# Altium PCB 数粒机接收板12通道.PcbDoc (part 2 of 2)
Units mil, origin at the board's own origin, x right, y up, seen from the top; angles counter-clockwise.
Board outline 12834.65 x 2362.2 mil, 2 copper layers (Top Layer, Bottom Layer); 305 components, 115 nets, 805 pads, 274 vias.
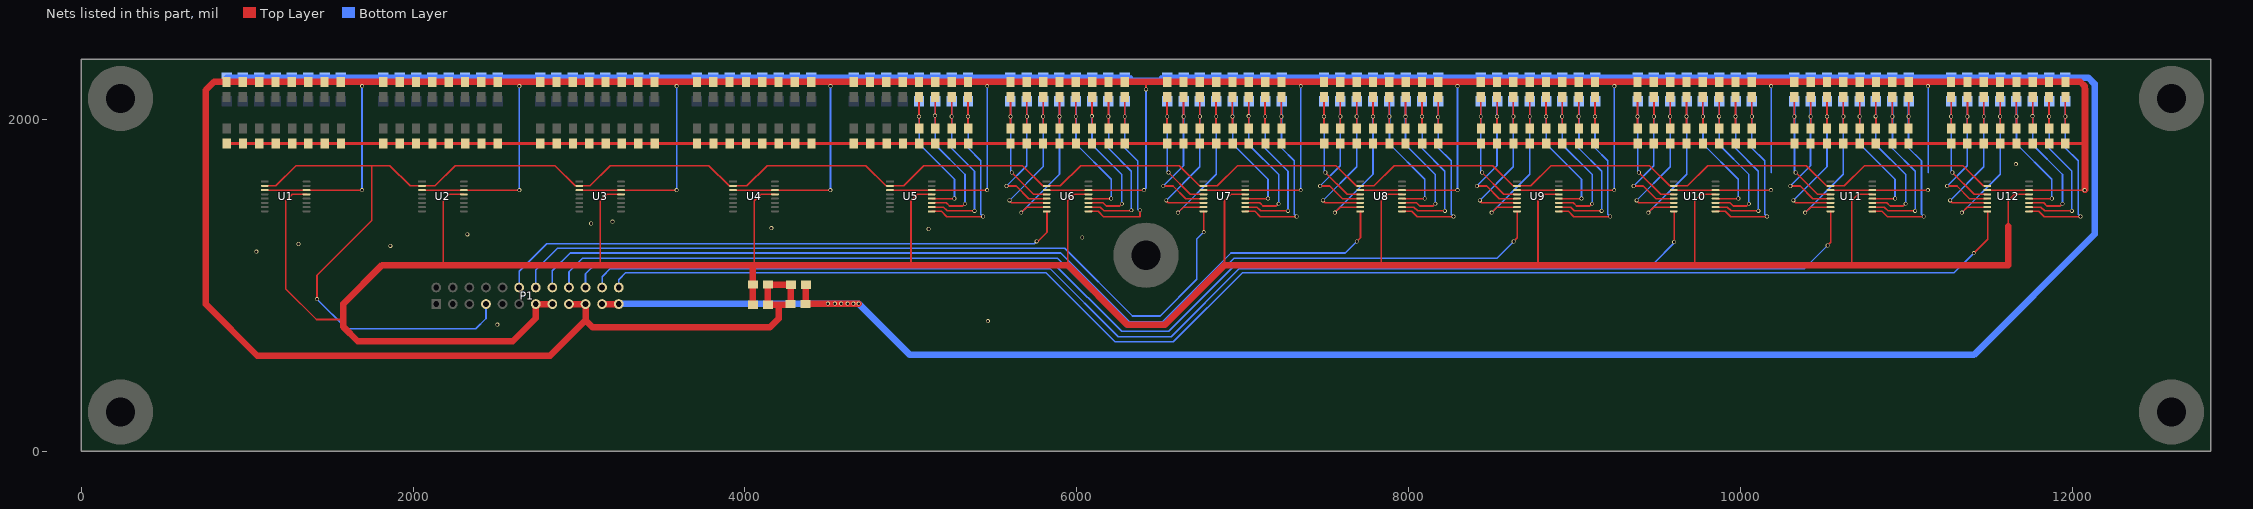
[diagram p2: the nets of this part, all layers, seen from the top]

## Via types
v1: diameter 23.62, hole 15.75, Top Layer to Bottom Layer, 274 vias

## Nets (pads, with @x,y where several pads share a name; then routed paths per layer and width w, separated by ;. In a path a pad name is that pad's centre, name@x,y a point inside that pad or via, vN(x,y) a via of type N, cw(c..) or ccw(c..) an arc to the next point about the centre after c; other vN are vias at no path point) (continued)
CH5-5: C41.2 D37.1 R37.2 U5.12 | length 999.9
  Top Layer w10: v1@5048.92,2017 R37.2@5048.92,2136.09 ; C41.2@5049.75,1945.78 v1@5049.75,2016.17 ; U5.12@5127.71,1522.36 5261.78,1522.36 v1(5262.74,1523.32)
  Bottom Layer w10: D37.1@5050.19,2110.24 5050.19,1851.88 5262.74,1639.32 v1(5262.74,1523.32)
  other v1: 5049.23,2017
CH5-6: C42.2 D38.1 R38.2 U5.11 | length 1096.2
  Top Layer w10: U5.11@5127.71,1496.77 5213.3,1496.77 5232.74,1477.32 5312.74,1477.32 v1(5326.74,1491.32) ; v1@5147.34,2017 R38.2@5147.34,2136.09 ; C42.2@5147.65,1945.78 v1@5147.65,2016.69
  Bottom Layer w10: D38.1@5147.12,2110.24 5147.12,1846.95 5326.74,1667.32 v1(5326.74,1491.32)
  other v1: 5145.34,2022
CH5-7: C43.2 D39.1 R39.2 U5.10 | length 1174
  Top Layer w10: U5.10@5127.71,1471.18 5196.89,1471.18 5219.74,1448.32 v1(5383.74,1448.32) ; C43.2@5246.08,1945.78 v1(5246.08,2017) R39.2@5246.08,2135.78
  Bottom Layer w10: D39.1@5247.19,2110.24 5247.19,1823.88 5383.74,1687.32 v1(5383.74,1448.32)
CH5-8: C44.2 D40.1 R40.2 U5.9 | length 1245.3
  Top Layer w10: U5.9@5127.71,1445.59 5184.48,1445.59 5216.74,1413.32 5434.74,1413.32 v1(5435.74,1414.32) ; C44.2@5344.5,1945.78 v1(5344.5,2017) R40.2@5344.5,2135.77
  Bottom Layer w10: D40.1@5345.12,2110.24 5345.12,1826.95 5421.74,1750.32 5421.74,1428.32 v1(5435.74,1414.32)
CH6: P1.12 U6.8 | length 3503.9
  Top Layer w10: v1(5758.3,1264.61) 5766.3,1264.61 5820.63,1318.93 5820.63,1443.59 U6.8@5818.63,1445.59
  Bottom Layer w10: P1.12@2639.3,986.61 2639.3,1084.61 2805.17,1250.48 5744.17,1250.48 v1(5758.3,1264.61)
CH6-1: C45.2 D41.1 R41.2 U6.4 | length 888.6
  Top Layer w10: C45.2@5600.41,1945.78 v1(5600.41,2017) R41.2@5600.41,2135.77 ; v1(5608.25,1679.42) 5739.72,1547.95 U6.4@5818.63,1547.95
  Bottom Layer w10: D41.1@5601.19,2110.24 5601.19,1686.48 v1(5608.25,1679.42)
CH6-2: C46.2 D42.1 R42.2 U6.5 | length 1025.7
  Top Layer w10: v1(5576.63,1598.32) 5635.63,1598.32 5711.59,1522.36 U6.5@5818.63,1522.36 ; C46.2@5698.83,1945.78 v1@5698.83,2016.98 ; v1@5699.61,2016.2 R42.2@5699.61,2135
  Bottom Layer w10: v1(5576.63,1598.32) 5698.07,1719.76 D42.1@5698.07,2110.24
  other v1: 5698.83,2017
CH6-3: C47.2 D43.1 R43.2 U6.6 | length 1104
  Top Layer w10: v1(5594.63,1511.32) 5594.63,1509.32 5607.18,1496.77 U6.6@5818.63,1496.77 ; C47.2@5797.26,1945.78 v1(5797.26,2017) R43.2@5797.26,2135.77
  Bottom Layer w10: v1(5594.63,1511.32) 5797.07,1713.76 D43.1@5797.07,2110.24
CH6-4: C48.2 D44.1 R44.2 U6.7 | length 1124.1
  Top Layer w10: v1(5665.63,1438.23) 5698.57,1471.18 U6.7@5818.63,1471.18 ; C48.2@5895.69,1945.78 v1(5895.69,2017) R44.2@5895.69,2135.77
  Bottom Layer w10: v1(5665.63,1438.23) 5896.07,1668.68 D44.1@5896.07,2110.24
CH6-5: C49.2 D45.1 R45.2 U6.12 | length 999.9
  Top Layer w10: v1@5993.8,2017 R45.2@5993.8,2136.09 ; C49.2@5994.63,1945.78 v1@5994.63,2016.17 ; U6.12@6072.59,1522.36 6206.67,1522.36 v1(6207.63,1523.32)
  Bottom Layer w10: D45.1@5995.07,2110.24 5995.07,1851.88 6207.63,1639.32 v1(6207.63,1523.32)
  other v1: 5994.11,2017
CH6-6: C50.2 D46.1 R46.2 U6.11 | length 1096.2
  Top Layer w10: U6.11@6072.59,1496.77 6158.18,1496.77 6177.63,1477.32 6257.63,1477.32 v1(6271.63,1491.32) ; v1@6092.22,2017 R46.2@6092.22,2136.09 ; C50.2@6092.54,1945.78 v1@6092.54,2016.69
  Bottom Layer w10: D46.1@6092.07,2110.24 6092.07,1846.88 6271.63,1667.32 v1(6271.63,1491.32)
  other v1: 6091.34,2019
CH6-7: C51.2 D47.1 R47.2 U6.10 | length 1181.7
  Top Layer w10: U6.10@6072.59,1471.18 6141.77,1471.18 6164.63,1448.32 6328.63,1448.32 6329,1448.69 v1(6329,1452) ; C51.2@6190.96,1945.78 v1(6190.96,2017) R47.2@6190.96,2135.78
  Bottom Layer w10: D47.1@6192.07,2110.24 6192.07,1823.88 6328.63,1687.32 6328.63,1448.32 6329,1448.69 v1(6329,1452)
CH6-8: C52.2 D48.1 R48.2 U6.9 | length 1250.4
  Top Layer w10: U6.9@6072.59,1445.59 6129.36,1445.59 6161.63,1413.32 6379.63,1413.32 6381,1414.69 v1(6381,1452) ; C52.2@6289.39,1945.78 v1(6289.39,2017) R48.2@6289.39,2135.77
  Bottom Layer w10: D48.1@6289.07,2110.24 6289.07,1827.88 6366.63,1750.32 6366.63,1458.82 6373.45,1452 v1(6381,1452)
CH7: P1.14 U7.8 | length 4833.5
  Top Layer w10: U7.8@6763.51,1445.59 6765.51,1443.59 6765.51,1357.32 6765.3,1357.11 v1(6765.3,1320.61)
  Bottom Layer w10: P1.14@2739.3,986.61 2739.3,1091.61 2870.3,1222.6 5931,1222.6 5931,1220 6336,815 6503,815 6724,1036 6724,1279.31 v1(6765.3,1320.61)
CH7-1: C53.2 D49.1 R49.2 U7.4 | length 888.6
  Top Layer w10: C53.2@6544.36,1945.78 6544.36,2017 R49.2@6544.36,2135.77 ; v1(6553.13,1679.42) 6684.6,1547.95 U7.4@6763.51,1547.95
  Bottom Layer w10: D49.1@6546.07,2110.24 6546.07,1686.48 v1(6553.13,1679.42)
  other v1: 6545.29,2017
CH7-2: C54.2 D50.1 R50.2 U7.5 | length 1025.7
  Top Layer w10: v1(6521.51,1598.32) 6580.51,1598.32 6656.47,1522.36 U7.5@6763.51,1522.36 ; C54.2@6642.79,1945.78 v1@6642.79,2016.98 ; v1@6643.56,2016.2 R50.2@6643.56,2135
  Bottom Layer w10: v1(6521.51,1598.32) 6642.95,1719.76 D50.1@6642.95,2110.24
  other v1: 6643.72,2017
CH7-3: C55.2 D51.1 R51.2 U7.6 | length 1104
  Top Layer w10: v1(6539.51,1511.32) 6539.51,1509.32 6552.06,1496.77 U7.6@6763.51,1496.77 ; C55.2@6741.21,1945.78 6741.21,2017 R51.2@6741.21,2135.77
  Bottom Layer w10: v1(6539.51,1511.32) 6741.95,1713.76 D51.1@6741.95,2110.24
  other v1: 6742.14,2017
CH7-4: C56.2 D52.1 R52.2 U7.7 | length 1124.1
  Top Layer w10: v1(6610.51,1438.23) 6643.45,1471.18 U7.7@6763.51,1471.18 ; C56.2@6839.64,1945.78 6839.64,2017 R52.2@6839.64,2135.77
  Bottom Layer w10: v1(6610.51,1438.23) 6840.95,1668.68 D52.1@6840.95,2110.24
  other v1: 6840.57,2017
CH7-5: C57.2 D53.1 R53.2 U7.12 | length 999.9
  Top Layer w10: v1@6937.75,2017 R53.2@6937.75,2136.09 ; C57.2@6938.59,1945.78 v1@6938.59,2016.17 ; U7.12@7017.48,1522.36 7151.55,1522.36 v1(7152.51,1523.32)
  Bottom Layer w10: D53.1@6939.95,2110.24 6939.95,1851.88 7152.51,1639.32 v1(7152.51,1523.32)
  other v1: 6938.99,2017
CH7-6: C58.2 D54.1 R54.2 U7.11 | length 1096.2
  Top Layer w10: U7.11@7017.48,1496.77 7103.06,1496.77 7122.51,1477.32 7202.51,1477.32 v1(7216.51,1491.32) ; v1@7036.18,2017 R54.2@7036.18,2136.09 ; C58.2@7036.49,1945.78 v1@7036.49,2016.69
  Bottom Layer w10: D54.1@7036.95,2110.24 7036.95,1846.88 7216.51,1667.32 v1(7216.51,1491.32)
  other v1: 7036.34,2019
CH7-7: C59.2 D55.1 R55.2 U7.10 | length 1174
  Top Layer w10: U7.10@7017.48,1471.18 7086.65,1471.18 7109.51,1448.32 v1(7273.51,1448.32) ; C59.2@7134.91,1945.78 7134.91,2017 R55.2@7134.91,2135.78
  Bottom Layer w10: D55.1@7136.95,2110.24 7136.95,1823.88 7273.51,1687.32 v1(7273.51,1448.32)
  other v1: 7135.84,2017
CH7-8: C60.2 D56.1 R56.2 U7.9 | length 1245.7
  Top Layer w10: U7.9@7017.48,1445.59 7074.24,1445.59 7106.51,1413.32 7324.51,1413.32 v1(7325.51,1414.32) ; C60.2@7233.34,1945.78 v1(7233.34,2017) R56.2@7233.34,2135.77
  Bottom Layer w10: D56.1@7233.95,2110.24 7233.95,1827.88 7311.51,1750.32 7311.51,1428.32 v1(7325.51,1414.32)
CH8: P1.16 U8.8 | length 5556.3
  Top Layer w10: v1(7687.3,1263.61) 7710.39,1286.7 7710.39,1443.59 U8.8@7708.39,1445.59
  Bottom Layer w10: P1.16@2839.3,986.61 2839.3,1086.61 2947.3,1194.61 5903.67,1194.61 6317.28,781 6516.3,781 6929.91,1194.61 7618.3,1194.61 v1(7687.3,1263.61)
CH8-1: C61.2 D57.1 R57.2 U8.4 | length 888.6
  Top Layer w10: v1@7489.86,2013.51 R57.2@7489.86,2132.28 ; C61.2@7490.17,1945.78 v1@7490.17,2016.98 ; v1(7498.01,1679.42) 7629.48,1547.95 U8.4@7708.39,1547.95
  Bottom Layer w10: D57.1@7490.95,2110.24 7490.95,1686.48 v1(7498.01,1679.42)
  other v1: 7490.17,2017
CH8-2: C62.2 D58.1 R58.2 U8.5 | length 1025.7
  Top Layer w10: v1(7466.39,1598.32) 7525.39,1598.32 7601.35,1522.36 U8.5@7708.39,1522.36 ; C62.2@7588.6,1945.78 v1(7588.6,2017) ; v1@7589.06,2012.71 R58.2@7589.06,2131.51
  Bottom Layer w10: v1(7466.39,1598.32) 7587.83,1719.76 D58.1@7587.83,2110.24
CH8-3: C63.2 D59.1 R59.2 U8.6 | length 1104
  Top Layer w10: v1(7484.39,1511.32) 7484.39,1509.32 7496.94,1496.77 U8.6@7708.39,1496.77 ; v1@7686.71,2013.51 R59.2@7686.71,2132.28 ; C63.2@7687.02,1945.78 v1(7687.02,2017)
  Bottom Layer w10: v1(7484.39,1511.32) 7686.83,1713.76 D59.1@7686.83,2110.24
CH8-4: C64.2 D60.1 R60.2 U8.7 | length 1123.3
  Top Layer w10: v1(7555.39,1438.23) 7588.33,1471.18 U8.7@7708.39,1471.18 ; v1@7785.13,2013.51 R60.2@7785.13,2132.28 ; C64.2@7785.97,1945.78 v1@7785.97,2016.17
  Bottom Layer w10: v1(7555.39,1438.23) 7785.83,1668.68 D60.1@7785.83,2110.24
  other v1: 7785.45,2017
CH8-5: C65.2 D61.1 R61.2 U8.12 | length 1000.4
  Top Layer w10: v1@7883.25,2013.51 R61.2@7883.25,2132.59 ; C65.2@7883.87,1945.78 v1@7883.87,2016.69 ; U8.12@7962.36,1522.36 8096.43,1522.36 v1(8097.39,1523.32)
  Bottom Layer w10: D61.1@7884.83,2110.24 7884.83,1851.88 8097.39,1639.32 v1(8097.39,1523.32)
  other v1: 7883.87,2017
CH8-6: C66.2 D62.1 R62.2 U8.11 | length 1096.5
  Top Layer w10: U8.11@7962.36,1496.77 8047.94,1496.77 8067.39,1477.32 8147.39,1477.32 v1(8161.39,1491.32) ; v1@7981.67,2013.51 R62.2@7981.67,2132.59 ; C66.2@7982.3,1945.78 v1@7982.3,2017
  Bottom Layer w10: D62.1@7981.83,2110.24 7981.83,1846.88 8161.39,1667.32 v1(8161.39,1491.32)
  other v1: 7981.34,2016
CH8-7: C67.2 D63.1 R63.2 U8.10 | length 1174
  Top Layer w10: U8.10@7962.36,1471.18 8031.53,1471.18 8054.39,1448.32 v1(8218.39,1448.32) ; v1@8080.41,2013.51 R63.2@8080.41,2132.28 ; C67.2@8080.72,1945.78 v1(8080.72,2017)
  Bottom Layer w10: D63.1@8081.83,2110.24 8081.83,1823.88 8218.39,1687.32 v1(8218.39,1448.32)
CH8-8: C68.2 D64.1 R64.2 U8.9 | length 1243.6
  Top Layer w10: U8.9@7962.36,1445.59 8019.12,1445.59 8051.39,1413.32 8269.39,1413.32 v1(8270.39,1414.32) ; v1(8178.34,2014) v1@8178.83,2013.51 ; C68.2@8178.83,1945 v1@8178.83,2013.51 ; R64.2@8178.83,2132.28 v1@8178.83,2013.51
  Bottom Layer w10: D64.1@8178.83,2110.24 8178.83,1827.88 8256.39,1750.32 8256.39,1428.32 v1(8270.39,1414.32)
CH9: P1.18 U9.8 | length 6398.1
  Top Layer w10: v1(8633.3,1263.61) 8655.27,1285.58 8655.27,1443.59 U9.8@8653.27,1445.59
  Bottom Layer w10: P1.18@2939.3,986.61 2939.3,1081.61 3021.3,1163.61 5883.67,1163.61 6296.28,751 6535.3,751 6947.91,1163.61 8533.3,1163.61 v1(8633.3,1263.61)
CH9-1: C69.2 D65.1 R65.2 U9.4 | length 888.6
  Top Layer w10: C69.2@8434.74,1945.78 v1(8434.74,2017) R65.2@8434.74,2135.77 ; v1(8442.9,1679.42) 8574.36,1547.95 U9.4@8653.27,1547.95
  Bottom Layer w10: D65.1@8435.83,2110.24 8435.83,1686.48 v1(8442.9,1679.42)
CH9-2: C70.2 D66.1 R66.2 U9.5 | length 1025.7
  Top Layer w10: v1(8411.27,1598.32) 8470.27,1598.32 8546.23,1522.36 U9.5@8653.27,1522.36 ; C70.2@8533.17,1945.78 v1@8533.17,2016.98 ; v1@8533.94,2016.2 R66.2@8533.94,2135
  Bottom Layer w10: v1(8411.27,1598.32) 8532.71,1719.76 D66.1@8532.71,2110.24
  other v1: 8533.17,2017
CH9-3: C71.2 D67.1 R67.2 U9.6 | length 1104
  Top Layer w10: v1(8429.27,1511.32) 8429.27,1509.32 8441.82,1496.77 U9.6@8653.27,1496.77 ; C71.2@8631.59,1945.78 v1(8631.59,2017) R67.2@8631.59,2135.77
  Bottom Layer w10: v1(8429.27,1511.32) 8631.71,1713.76 D67.1@8631.71,2110.24
CH9-4: C72.2 D68.1 R68.2 U9.7 | length 1124.1
  Top Layer w10: v1(8500.27,1438.23) 8533.21,1471.18 U9.7@8653.27,1471.18 ; C72.2@8730.02,1945.78 v1(8730.02,2017) R68.2@8730.02,2135.77
  Bottom Layer w10: v1(8500.27,1438.23) 8730.71,1668.68 D68.1@8730.71,2110.24
CH9-5: C73.2 D69.1 R69.2 U9.12 | length 999.9
  Top Layer w10: v1@8828.13,2017 R69.2@8828.13,2136.09 ; C73.2@8828.97,1945.78 v1@8828.97,2016.17 ; U9.12@8907.24,1522.36 9041.31,1522.36 v1(9042.27,1523.32)
  Bottom Layer w10: D69.1@8829.71,2110.24 8829.71,1851.88 9042.27,1639.32 v1(9042.27,1523.32)
  other v1: 8828.44,2017
CH9-6: C74.2 D70.1 R70.2 U9.11 | length 1096.2
  Top Layer w10: U9.11@8907.24,1496.77 8992.82,1496.77 9012.27,1477.32 9092.27,1477.32 v1(9106.27,1491.32) ; v1@8926.56,2017 R70.2@8926.56,2136.09 ; C74.2@8926.87,1945.78 v1@8926.87,2016.69
  Bottom Layer w10: D70.1@8926.71,2110.24 8926.71,1846.88 9106.27,1667.32 v1(9106.27,1491.32)
  other v1: 8925.34,2017
CH9-7: C75.2 D71.1 R71.2 U9.10 | length 1174
  Top Layer w10: U9.10@8907.24,1471.18 8976.41,1471.18 8999.27,1448.32 v1(9163.27,1448.32) ; C75.2@9025.29,1945.78 v1(9025.29,2017) R71.2@9025.29,2135.78
  Bottom Layer w10: D71.1@9026.71,2110.24 9026.71,1823.88 9163.27,1687.32 v1(9163.27,1448.32)
CH9-8: C76.2 D72.1 R72.2 U9.9 | length 1245.7
  Top Layer w10: U9.9@8907.24,1445.59 8964,1445.59 8996.27,1413.32 9214.27,1413.32 v1(9215.27,1414.32) ; C76.2@9123.72,1945.78 v1(9123.72,2017) R72.2@9123.72,2135.77
  Bottom Layer w10: D72.1@9123.71,2110.24 9123.71,1827.88 9201.27,1750.32 9201.27,1428.32 v1(9215.27,1414.32)
CH10: P1.20 U10.8 | length 7256.3
  Top Layer w10: U10.8@9598.15,1445.59 9600.15,1443.59 v1(9600.15,1260.76) v1@9603.3,1257.61
  Bottom Layer w10: P1.20@3039.3,986.61 3039.3,1069.61 3100.3,1130.61 5861.67,1130.61 6270.28,722 6553.58,722 6962.19,1130.61 9476.3,1130.61 9601.3,1255.61 9601.3,1259.61 v1(9600.15,1260.76)
CH10-1: C77.2 D73.1 R73.2 U10.4 | length 888.6
  Top Layer w10: C77.2@9379.94,1945.78 v1(9379.94,2017) R73.2@9379.94,2135.77 ; v1(9387.78,1679.42) 9519.25,1547.95 U10.4@9598.15,1547.95
  Bottom Layer w10: D73.1@9380.71,2110.24 9380.71,1686.48 v1(9387.78,1679.42)
CH10-2: C78.2 D74.1 R74.2 U10.5 | length 1025.7
  Top Layer w10: v1(9356.15,1598.32) 9415.15,1598.32 9491.11,1522.36 U10.5@9598.15,1522.36 ; C78.2@9478.36,1945.78 v1@9478.36,2016.98 ; v1@9479.14,2016.2 R74.2@9479.14,2135
  Bottom Layer w10: v1(9356.15,1598.32) 9477.6,1719.76 D74.1@9477.6,2110.24
  other v1: 9478.36,2017
CH10-3: C79.2 D75.1 R75.2 U10.6 | length 1104
  Top Layer w10: v1(9374.15,1511.32) 9374.15,1509.32 9386.71,1496.77 U10.6@9598.15,1496.77 ; C79.2@9576.79,1945.78 v1(9576.79,2017) R75.2@9576.79,2135.77
  Bottom Layer w10: v1(9374.15,1511.32) 9576.6,1713.76 D75.1@9576.6,2110.24
CH10-4: C80.2 D76.1 R76.2 U10.7 | length 1124.1
  Top Layer w10: v1(9445.15,1438.23) 9478.1,1471.18 U10.7@9598.15,1471.18 ; C80.2@9675.21,1945.78 v1(9675.21,2017) R76.2@9675.21,2135.77
  Bottom Layer w10: v1(9445.15,1438.23) 9675.6,1668.68 D76.1@9675.6,2110.24
CH10-5: C81.2 D77.1 R77.2 U10.12 | length 999.9
  Top Layer w10: v1@9773.33,2017 R77.2@9773.33,2136.09 ; C81.2@9774.16,1945.78 v1@9774.16,2016.17 ; U10.12@9852.12,1522.36 9986.19,1522.36 v1(9987.15,1523.32)
  Bottom Layer w10: D77.1@9774.6,2110.24 9774.6,1851.88 9987.15,1639.32 v1(9987.15,1523.32)
  other v1: 9773.64,2017
CH10-6: C82.2 D78.1 R78.2 U10.11 | length 1096.2
  Top Layer w10: U10.11@9852.12,1496.77 9937.71,1496.77 9957.15,1477.32 10037.15,1477.32 v1(10051.15,1491.32) ; v1@9871.75,2017 R78.2@9871.75,2136.09 ; C82.2@9872.06,1945.78 v1@9872.06,2016.69
  Bottom Layer w10: D78.1@9871.6,2110.24 9871.6,1846.88 10051.15,1667.32 v1(10051.15,1491.32)
  other v1: 9871.34,2018
CH10-7: C83.2 D79.1 R79.2 U10.10 | length 1174
  Top Layer w10: U10.10@9852.12,1471.18 9921.3,1471.18 9944.15,1448.32 v1(10108.15,1448.32) ; C83.2@9970.49,1945.78 v1(9970.49,2017) R79.2@9970.49,2135.78
  Bottom Layer w10: D79.1@9971.6,2110.24 9971.6,1823.88 10108.15,1687.32 v1(10108.15,1448.32)
CH10-8: C84.2 D80.1 R80.2 U10.9 | length 1245.7
  Top Layer w10: U10.9@9852.12,1445.59 9908.89,1445.59 9941.15,1413.32 10159.15,1413.32 v1(10160.15,1414.32) ; C84.2@10068.91,1945.78 v1(10068.91,2017) R80.2@10068.91,2135.77
  Bottom Layer w10: D80.1@10068.6,2110.24 10068.6,1827.88 10146.15,1750.32 10146.15,1428.32 v1(10160.15,1414.32)
CH11: P1.22 U11.8 | length 8084
  Top Layer w10: v1(10525.3,1239.61) 10545.04,1259.34 10545.04,1443.59 U11.8@10543.04,1445.59
  Bottom Layer w10: P1.22@3139.3,986.61 3139.3,1051.61 3188.3,1100.61 5838.79,1100.61 6249.4,690 6569.3,690 6979.91,1100.61 10386.3,1100.61 v1(10525.3,1239.61)
CH11-1: C85.2 D81.1 R81.2 U11.4 | length 888.6
  Top Layer w10: C85.2@10324.82,1945.78 v1(10324.82,2017) R81.2@10324.82,2135.77 ; v1(10332.66,1679.42) 10464.13,1547.95 U11.4@10543.04,1547.95
  Bottom Layer w10: D81.1@10325.6,2110.24 10325.6,1686.48 v1(10332.66,1679.42)
CH11-2: C86.2 D82.1 R82.2 U11.5 | length 1025.7
  Top Layer w10: v1(10301.04,1598.32) 10360.04,1598.32 10436,1522.36 U11.5@10543.04,1522.36 ; C86.2@10423.24,1945.78 v1@10423.24,2016.98 ; v1@10424.02,2016.2 R82.2@10424.02,2135
  Bottom Layer w10: v1(10301.04,1598.32) 10422.48,1719.76 D82.1@10422.48,2110.24
  other v1: 10423.24,2017
CH11-3: C87.2 D83.1 R83.2 U11.6 | length 1104
  Top Layer w10: v1(10319.04,1511.32) 10319.04,1509.32 10331.59,1496.77 U11.6@10543.04,1496.77 ; C87.2@10521.67,1945.78 v1(10521.67,2017) R83.2@10521.67,2135.77
  Bottom Layer w10: v1(10319.04,1511.32) 10521.48,1713.76 D83.1@10521.48,2110.24
CH11-4: C88.2 D84.1 R84.2 U11.7 | length 1124.1
  Top Layer w10: v1(10390.04,1438.23) 10422.98,1471.18 U11.7@10543.04,1471.18 ; C88.2@10620.1,1945.78 v1(10620.1,2017) R84.2@10620.1,2135.77
  Bottom Layer w10: v1(10390.04,1438.23) 10620.48,1668.68 D84.1@10620.48,2110.24
CH11-5: C89.2 D85.1 R85.2 U11.12 | length 999.9
  Top Layer w10: v1@10718.21,2017 R85.2@10718.21,2136.09 ; C89.2@10719.04,1945.78 v1@10719.04,2016.17 ; U11.12@10797,1522.36 10931.08,1522.36 v1(10932.04,1523.32)
  Bottom Layer w10: D85.1@10719.48,2110.24 10719.48,1851.88 10932.04,1639.32 v1(10932.04,1523.32)
  other v1: 10718.52,2017
CH11-6: C90.2 D86.1 R86.2 U11.11 | length 1096.2
  Top Layer w10: U11.11@10797,1496.77 10882.59,1496.77 10902.04,1477.32 10982.04,1477.32 v1(10996.04,1491.32) ; v1@10816.63,2017 R86.2@10816.63,2136.09 ; C90.2@10816.95,1945.78 v1@10816.95,2016.69
  Bottom Layer w10: D86.1@10816.48,2110.24 10816.48,1846.88 10996.04,1667.32 v1(10996.04,1491.32)
  other v1: 10815.34,2018
CH11-7: C91.2 D87.1 R87.2 U11.10 | length 1174
  Top Layer w10: U11.10@10797,1471.18 10866.18,1471.18 10889.04,1448.32 v1(11053.04,1448.32) ; C91.2@10915.37,1945.78 v1(10915.37,2017) R87.2@10915.37,2135.78
  Bottom Layer w10: D87.1@10916.48,2110.24 10916.48,1823.88 11053.04,1687.32 v1(11053.04,1448.32)
CH11-8: C92.2 D88.1 R88.2 U11.9 | length 1245.7
  Top Layer w10: U11.9@10797,1445.59 10853.77,1445.59 10886.04,1413.32 11104.04,1413.32 v1(11105.04,1414.32) ; C92.2@11013.8,1945.78 v1(11013.8,2017) R88.2@11013.8,2135.77
  Bottom Layer w10: D88.1@11013.48,2110.24 11013.48,1827.88 11091.04,1750.32 11091.04,1428.32 v1(11105.04,1414.32)
CH12: P1.24 U12.8 | length 8913.6
  Top Layer w10: v1(11406.3,1193.61) 11489.92,1277.22 11489.92,1443.59 U12.8@11487.92,1445.59
  Bottom Layer w10: P1.24@3239.3,986.61 3239.3,1033.61 3282.17,1076.48 5812.81,1076.48 6230.28,659 6582.3,659 6999.78,1076.48 11289.17,1076.48 v1(11406.3,1193.61)
CH12-1: C93.2 D89.1 R89.2 U12.4 | length 888.6
  Top Layer w10: C93.2@11269.7,1945.78 v1(11269.7,2017) R89.2@11269.7,2135.77 ; v1(11277.54,1679.42) 11409.01,1547.95 U12.4@11487.92,1547.95
  Bottom Layer w10: D89.1@11270.48,2110.24 11270.48,1686.48 v1(11277.54,1679.42)
CH12-2: C94.2 D90.1 R90.2 U12.5 | length 1025.7
  Top Layer w10: v1(11245.92,1598.32) 11304.92,1598.32 11380.88,1522.36 U12.5@11487.92,1522.36 ; C94.2@11368.13,1945.78 v1@11368.13,2016.98 ; v1@11368.9,2016.2 R90.2@11368.9,2135
  Bottom Layer w10: v1(11245.92,1598.32) 11367.36,1719.76 D90.1@11367.36,2110.24
  other v1: 11368.13,2017
CH12-3: C95.2 D91.1 R91.2 U12.6 | length 1104
  Top Layer w10: v1(11263.92,1511.32) 11263.92,1509.32 11276.47,1496.77 U12.6@11487.92,1496.77 ; C95.2@11466.55,1945.78 v1(11466.55,2017) R91.2@11466.55,2135.77
  Bottom Layer w10: v1(11263.92,1511.32) 11466.36,1713.76 D91.1@11466.36,2110.24
CH12-4: C96.2 D92.1 R92.2 U12.7 | length 1124.1
  Top Layer w10: v1(11334.92,1438.23) 11367.86,1471.18 U12.7@11487.92,1471.18 ; C96.2@11564.98,1945.78 v1(11564.98,2017) R92.2@11564.98,2135.77
  Bottom Layer w10: v1(11334.92,1438.23) 11565.36,1668.68 D92.1@11565.36,2110.24
CH12-5: C97.2 D93.1 R93.2 U12.12 | length 999.9
  Top Layer w10: v1@11663.09,2017 R93.2@11663.09,2136.09 ; C97.2@11663.93,1945.78 v1@11663.93,2016.17 ; U12.12@11741.89,1522.36 11875.96,1522.36 v1(11876.92,1523.32)
  Bottom Layer w10: D93.1@11664.36,2110.24 11664.36,1851.88 11876.92,1639.32 v1(11876.92,1523.32)
  other v1: 11663.4,2017
CH12-6: C98.2 D94.1 R94.2 U12.11 | length 1096.2
  Top Layer w10: U12.11@11741.89,1496.77 11827.47,1496.77 11846.92,1477.32 11926.92,1477.32 v1(11940.92,1491.32) ; v1@11761.52,2017 R94.2@11761.52,2136.09 ; C98.2@11761.83,1945.78 v1@11761.83,2016.69
  Bottom Layer w10: D94.1@11761.36,2110.24 11761.36,1846.88 11940.92,1667.32 v1(11940.92,1491.32)
  other v1: 11760.34,2019
CH12-7: C99.2 D95.1 R95.2 U12.10 | length 1174
  Top Layer w10: U12.10@11741.89,1471.18 11811.06,1471.18 11833.92,1448.32 v1(11997.92,1448.32) ; C99.2@11860.25,1945.78 v1(11860.25,2017) R95.2@11860.25,2135.78
  Bottom Layer w10: D95.1@11861.36,2110.24 11861.36,1823.88 11997.92,1687.32 v1(11997.92,1448.32)
CH12-8: C100.2 D96.1 R96.2 U12.9 | length 1245.7
  Top Layer w10: U12.9@11741.89,1445.59 11798.65,1445.59 11830.92,1413.32 12048.92,1413.32 v1(12049.92,1414.32) ; C100.2@11958.68,1945.78 v1(11958.68,2017) R96.2@11958.68,2135.77
  Bottom Layer w10: D96.1@11958.36,2110.24 11958.36,1827.88 12035.92,1750.32 12035.92,1428.32 v1(12049.92,1414.32)
EN: P1.7 U1.2 U2.2 U3.2 U4.2 U5.2 U6.2 U7.2 U8.2 U9.2 U10.2 U11.2 U12.2 | length 13642.7
  Top Layer w10: U1.2@1105.86,1599.13 1171.67,1599.13 1293.86,1721.31 1747.86,1721.31 ; v1(1420.86,916.32) 1420.86,1061.17 1749.86,1390.17 1749.86,1719.31 1747.86,1721.31 ; U12.2@11487.92,1599.13 11464.11,1599.13 11341.92,1721.31 10747.91,1721.31 10625.73,1599.13 U11.2@10543.04,1599.13 10519.23,1599.13 10397.04,1721.31 9803.03,1721.31 9680.85,1599.13 U10.2@9598.15,1599.13 9574.34,1599.13 9452.16,1721.31 8858.15,1721.31 8735.96,1599.13 U9.2@8653.27,1599.13 8629.46,1599.13 8507.28,1721.31 7913.27,1721.31 7791.08,1599.13 U8.2@7708.39,1599.13 7684.58,1599.13 7562.4,1721.31 6968.38,1721.31 6846.2,1599.13 U7.2@6763.51,1599.13 6739.7,1599.13 6617.51,1721.31 6023.5,1721.31 5901.32,1599.13 U6.2@5818.63,1599.13 5794.82,1599.13 5672.63,1721.31 5078.62,1721.31 4956.44,1599.13 U5.2@4873.74,1599.13 4849.93,1599.13 4727.75,1721.31 4133.74,1721.31 4011.55,1599.13 U4.2@3928.86,1599.13 3905.05,1599.13 3782.87,1721.31 3188.86,1721.31 3066.67,1599.13 U3.2@3001.86,1599.13 2977.05,1599.13 2854.87,1721.31 2253.86,1721.31 2131.67,1599.13 U2.2@2053.86,1599.13 1982.05,1599.13 1859.87,1721.31 1747.86,1721.31
  Bottom Layer w10: v1(1420.86,916.32) 1599.57,737.61 2377.3,737.61 2439.3,799.61 P1.7@2439.3,886.61
GND: C1.1 C2.1 C3.1 C4.1 C5.1 C6.1 C7.1 C8.1 C9.1 C10.1 C11.1 C12.1 C13.1 C14.1 C15.1 C16.1 C17.1 C18.1 C19.1 C20.1 C21.1 C22.1 C23.1 C24.1 C25.1 C26.1 C27.1 C28.1 C29.1 C30.1 C31.1 C32.1 C33.1 C34.1 C35.1 C36.1 C37.1 C38.1 C39.1 C40.1 C41.1 C42.1 C43.1 C44.1 C45.1 C46.1 C47.1 C48.1 C49.1 C50.1 C51.1 C52.1 C53.1 C54.1 C55.1 C56.1 C57.1 C58.1 C59.1 C60.1 C61.1 C62.1 C63.1 C64.1 C65.1 C66.1 C67.1 C68.1 C69.1 C70.1 C71.1 C72.1 C73.1 C74.1 C75.1 C76.1 C77.1 C78.1 C79.1 C80.1 C81.1 C82.1 C83.1 C84.1 C85.1 C86.1 C87.1 C88.1 C89.1 C90.1 C91.1 C92.1 C93.1 C94.1 C95.1 C96.1 C97.1 C98.1 C99.1 C100.1 P1.17 P1.19 R1.1 R2.1 R3.1 R4.1 R5.1 R6.1 R7.1 R8.1 R9.1 R10.1 R11.1 R12.1 R13.1 R14.1 R15.1 R16.1 R17.1 R18.1 R19.1 R20.1 R21.1 R22.1 R23.1 R24.1 R25.1 R26.1 R27.1 R28.1 R29.1 R30.1 R31.1 R32.1 R33.1 R34.1 R35.1 R36.1 R37.1 R38.1 R39.1 R40.1 R41.1 R42.1 R43.1 R44.1 R45.1 R46.1 R47.1 R48.1 R49.1 R50.1 R51.1 R52.1 R53.1 R54.1 R55.1 R56.1 R57.1 R58.1 R59.1 R60.1 R61.1 R62.1 R63.1 R64.1 R65.1 R66.1 R67.1 R68.1 R69.1 R70.1 R71.1 R72.1 R73.1 R74.1 R75.1 R76.1 R77.1 R78.1 R79.1 R80.1 R81.1 R82.1 R83.1 R84.1 R85.1 R86.1 R87.1 R88.1 R89.1 R90.1 R91.1 R92.1 R93.1 R94.1 R95.1 R96.1 U1.3 U1.14 U2.3 U2.14 U3.3 U3.14 U4.3 U4.14 U5.3 U5.14 U6.3 U6.14 U7.3 U7.14 U8.3 U8.14 U9.3 U9.14 U10.3 U10.14 U11.3 U11.14 U12.3 U12.14 | length 42998.2
  Top Layer w10: U1.3@1105.86,1573.54 U1.14@1357.83,1573.54 v1(1692.3,1573.54) ; v1(1692.51,2200.24) 1692.51,2225.61 ; U2.3@2053.86,1573.54 U2.14@2305.83,1573.54 v1(2640.3,1573.54) ; 2640,2226.1 2640.51,2225.59 v1(2640.51,2200.24) ; U3.3@3001.86,1573.54 U3.14@3253.83,1573.54 v1(3588.3,1573.54) ; v1(3588.51,2200.24) 3588.51,2225.61 ; U4.3@3928.86,1573.54 U4.14@4180.83,1573.54 v1(4515.3,1573.54) ; v1(4515.51,2200.24) 4515.51,2225.61 ; U5.3@4873.74,1573.54 U5.14@5125.71,1573.54 v1(5460.19,1573.54) ; v1(5460.39,2200.24) 5460.39,2225.61 ; U6.3@5818.63,1573.54 U6.14@6070.59,1573.54 v1(6405.07,1573.54) ; 6417,2226.1 6417.32,2225.78 v1(6417.32,2181.1) ; U7.3@6763.51,1573.54 U7.14@7015.48,1573.54 v1(7349.95,1573.54) ; v1(7350.16,2200.24) 7350.16,2225.61 ; U8.3@7708.39,1573.54 U8.14@7960.36,1573.54 v1(8294.83,1573.54) ; v1(8295.04,2200.24) 8295.04,2225.61 ; U9.3@8653.27,1573.54 U9.14@8905.24,1573.54 v1(9239.71,1573.54) ; v1(9239.92,2200.24) 9239.92,2225.61 ; U10.3@9598.15,1573.54 v1(10184.6,1573.54) ; v1(10184.8,2200.24) 10184.8,2225.61 ; U11.3@10543.04,1573.54 v1(11129.48,1573.54) ; v1(11129.68,2200.24) 11129.68,2225.61 ; U12.3@11487.92,1573.54 U12.14@11739.89,1573.54 v1(12074.36,1573.54)
  Top Layer w20: C5.1@876.78,1855 C6.1@975.2,1855 C7.1@1073.63,1855 C8.1@1172.05,1855 C9.1@1271,1855 C10.1@1368.9,1855 C11.1@1467.33,1855 C12.1@1565.75,1855 C13.1@1820.67,1855 C14.1@1920.12,1855 C15.1@2018.12,1855 C16.1@2117.12,1855 C17.1@2215.12,1855 C18.1@2314.12,1855 C19.1@2412.12,1855 C20.1@2510.12,1855 C21.1@2766.12,1855 C22.1@2865.12,1855 C23.1@2964.12,1855 C24.1@3062.12,1855 C25.1@3160.56,1855 C26.1@3258.12,1855 C27.1@3357.03,1855 C28.1@3456.03,1855 C29.1@3711.42,1855 C30.1@3810.12,1855 C31.1@3908.12,1855 C32.1@4006.3,1855 C33.1@4105.12,1855 C34.1@4204.12,1855 C35.1@4303.12,1855 C36.1@4401.12,1855 C37.1@4656.3,1855 C38.1@4755.12,1855 C39.1@4854.12,1855 C40.1@4952.12,1855 C41.1@5050.19,1855 C42.1@5147.12,1855 C43.1@5247.19,1855 C44.1@5345.12,1855 C45.1@5601.19,1855 C46.1@5698.07,1855 C47.1@5797.07,1855 C48.1@5896.07,1855 C49.1@5995.07,1855 C50.1@6092.07,1855 C51.1@6192.07,1855 C52.1@6289.07,1855 C53.1@6546.07,1855 C54.1@6642.95,1855 C55.1@6741.95,1855 C56.1@6840.95,1855 C57.1@6939.95,1855 C58.1@7036.95,1855 C59.1@7136.95,1855 C60.1@7233.95,1855 C61.1@7490.95,1855 C62.1@7587.83,1855 C63.1@7686.83,1855 C64.1@7785.83,1855 C65.1@7884.83,1855 C66.1@7981.83,1855 C67.1@8081.83,1855 C68.1@8178.83,1855 C69.1@8435.83,1855 C70.1@8532.71,1855 C71.1@8631.71,1855 C72.1@8730.71,1855 C73.1@8829.71,1855 C74.1@8926.71,1855 C75.1@9026.71,1855 C76.1@9123.71,1855 C77.1@9380.71,1855 C78.1@9477.6,1855 C79.1@9576.6,1855 C80.1@9675.6,1855 C81.1@9774.6,1855 C82.1@9871.6,1855 C83.1@9971.6,1855 C84.1@10068.6,1855 C85.1@10325.6,1855 C86.1@10422.48,1855 C87.1@10521.48,1855 C88.1@10620.48,1855 C89.1@10719.48,1855 C90.1@10816.48,1855 C91.1@10916.48,1855 C92.1@11013.48,1855 C93.1@11270.48,1855 C94.1@11367.36,1855 C95.1@11466.36,1855 C96.1@11565.36,1855 C97.1@11664.36,1855 C98.1@11761.36,1855 C99.1@11861.36,1855 C100.1@11958.36,1855 12074.86,1855 12076.86,1857
  Top Layer w39.37: 750.51,2176.24 800.38,2226.1 R3.1@1072.52,2226.1 R6.1@1367.8,2226.1 R8.1@1564.65,2226.1 R9.1@1820.87,2226.1 R10.1@1919.29,2226.1 R13.1@2214.57,2226.1 R16.1@2509.84,2226.1 2640,2226.1 R17.1@2765.75,2226.1 R19.1@2962.6,2226.1 R20.1@3061.02,2226.1 R25.1@3710.63,2226.1 R28.1@4005.9,2226.1 R31.1@4301.18,2226.1 R33.1@4655.51,2226.1 R34.1@4753.94,2226.1 R35.1@4852.36,2226.1 R36.1@4950.79,2226.1 R37.1@5049.21,2226.1 R38.1@5147.64,2226.1 R39.1@5246.06,2226.1 R40.1@5344.49,2226.1 R41.1@5600.39,2226.1 R42.1@5698.82,2226.1 R43.1@5797.24,2226.1 R44.1@5895.67,2226.1 R45.1@5994.09,2226.1 R46.1@6092.52,2226.1 R47.1@6190.94,2226.1 R48.1@6289.37,2226.1 6417,2226.1 R49.1@6545.28,2226.1 R50.1@6643.7,2226.1 R51.1@6742.13,2226.1 R52.1@6840.55,2226.1 R53.1@6938.98,2226.1 R54.1@7037.4,2226.1 R55.1@7135.83,2226.1 R56.1@7234.25,2226.1 R57.1@7490.16,2226.1 R58.1@7588.58,2226.1 R59.1@7687.01,2226.1 R60.1@7785.43,2226.1 R61.1@7883.86,2226.1 R62.1@7982.28,2226.1 R63.1@8080.71,2226.1 R64.1@8179.13,2226.1 R65.1@8434.73,2226.1 R66.1@8533.15,2226.1 R67.1@8631.58,2226.1 R68.1@8730,2226.1 R69.1@8828.43,2226.1 R70.1@8926.85,2226.1 R71.1@9025.28,2226.1 R72.1@9123.7,2226.1 R73.1@9379.92,2226.1 R74.1@9478.35,2226.1 R75.1@9576.77,2226.1 R76.1@9675.2,2226.1 R77.1@9773.62,2226.1 R78.1@9872.05,2226.1 R79.1@9970.47,2226.1 R80.1@10068.9,2226.1 R81.1@10324.8,2226.1 R82.1@10423.23,2226.1 R83.1@10521.65,2226.1 R84.1@10620.08,2226.1 R85.1@10718.5,2226.1 R86.1@10816.93,2226.1 R87.1@10915.35,2226.1 R88.1@11013.78,2226.1 R89.1@11269.69,2226.1 R90.1@11368.11,2226.1 R91.1@11466.54,2226.1 R92.1@11564.96,2226.1 R93.1@11663.39,2226.1 R94.1@11761.81,2226.1 R95.1@11860.24,2226.1 R96.1@11958.66,2226.1 12048.7,2226.1 12076.06,2198.74 ; 751.3,2176.24 751.3,885.61 1061.3,575.61 2825.3,575.61 3039.3,789.61 ; P1.17@2939.3,886.61 P1.19@3039.3,886.61 3039.3,789.61 ; C2.1@4139.86,1004.32 4275.86,1004.32 C4.1@4276.86,1003.32 4276.86,889.32 4269.86,882.32 4203.3,882.32 ; C2.1@4140.3,1003.61 4137.86,1001.17 C1.1@4137.86,882.32 4203.3,882.32 ; v1@12076.86,1576.03 12076.86,1857 12076.86,2181.1 ; 3039.3,789.61 3083.3,745.61 4149.3,745.61 4203.3,799.61 4203.3,882.32
  Bottom Layer w10: v1@1694.01,2198.74 v1(1692.51,2200.24) 1692.3,2200.03 v1(1692.3,1573.54) v1@1694.8,1576.03 ; v1(2640.3,1573.54) v1@2640.51,1573.75 ; v1(2640.51,2200.24) v1@2640.51,1573.75 ; v1@2642.8,1576.03 v1@2640.51,1573.75 ; v1(3588.51,2200.24) 3588.3,2200.03 v1(3588.3,1573.54) v1@3590.8,1576.03 ; v1(4515.51,2200.24) 4515.3,2200.03 v1(4515.3,1573.54) v1@4517.8,1576.03 ; v1(5460.39,2200.24) 5460.19,2200.03 v1(5460.19,1573.54) v1@5462.68,1576.03 ; v1(6405.07,1573.54) 6417.32,1585.79 v1(6417.32,2181.1) ; v1(7350.16,2200.24) 7349.95,2200.03 v1(7349.95,1573.54) v1@7352.45,1576.03 ; v1(8294.83,1573.54) 8294.83,2200.03 v1(8295.04,2200.24) ; v1(9239.92,2200.24) 9239.71,2200.03 v1(9239.71,1573.54) v1@9242.21,1576.03 ; v1(10184.6,1573.54) v1@10187.09,1576.03 ; 10186.3,1679.66 v1@10186.3,2198.74 ; v1(11129.48,1573.54) v1@11131.97,1576.03 ; 11131.18,1679.66 v1@11131.18,2198.74 ; v1(12074.36,1573.54) v1@12076.86,1576.03
  other v1: 2508.12,762.48 5464.12,783.48 1055.12,1202.48 1863.12,1237.48 1309.12,1248.48 6033,1288 2327.12,1306.48 5107.12,1339.48 4159.12,1344.48 3073.12,1372.48 3202.12,1383.48 11660.12,1730.48
VCC3.3: C3.2 C4.2 D1.2 D2.2 D3.2 D4.2 D5.2 D6.2 D7.2 D8.2 D9.2 D10.2 D11.2 D12.2 D13.2 D14.2 D15.2 D16.2 D17.2 D18.2 D19.2 D20.2 D21.2 D22.2 D23.2 D24.2 D25.2 D26.2 D27.2 D28.2 D29.2 D30.2 D31.2 D32.2 D33.2 D34.2 D35.2 D36.2 D37.2 D38.2 D39.2 D40.2 D41.2 D42.2 D43.2 D44.2 D45.2 D46.2 D47.2 D48.2 D49.2 D50.2 D51.2 D52.2 D53.2 D54.2 D55.2 D56.2 D57.2 D58.2 D59.2 D60.2 D61.2 D62.2 D63.2 D64.2 D65.2 D66.2 D67.2 D68.2 D69.2 D70.2 D71.2 D72.2 D73.2 D74.2 D75.2 D76.2 D77.2 D78.2 D79.2 D80.2 D81.2 D82.2 D83.2 D84.2 D85.2 D86.2 D87.2 D88.2 D89.2 D90.2 D91.2 D92.2 D93.2 D94.2 D95.2 D96.2 P1.21 P1.23 | length 22057.1
  Top Layer w39.37: P1.21@3139.3,886.61 P1.23@3239.3,886.61 ; C3.2@4364.86,887.32 4367.15,889.61 v1(4500.3,889.61) v1(4542.3,889.61) v1(4580.3,889.61) v1(4619.3,889.61) v1(4653.3,889.61) v1(4685.3,889.61) ; C3.2@4366.86,889.32 C4.2@4366.86,1003.32
  Bottom Layer w39.37: D1.2@875.98,2251.97 6314.48,2251.97 6333.38,2233.07 6501.26,2233.07 6520.16,2251.97 12095.78,2251.97 12134.51,2213.24 ; P1.23@3239.3,886.61 3242.3,889.61 v1(4500.3,889.61) v1(4542.3,889.61) v1(4580.3,889.61) v1(4619.3,889.61) v1(4653.3,889.61) v1(4685.3,889.61) 4994.44,580.48 11407.17,580.48 12135.3,1308.61 12135.3,2213.24
VCC5V: C1.2 C2.2 P1.13 P1.15 U1.13 U2.13 U3.13 U4.13 U5.13 U6.13 U7.13 U8.13 U9.13 U10.13 U11.13 U12.13 | length 19158.2
  Top Layer w10: U1.13@1357.83,1547.95 1271.49,1547.95 1232.86,1509.32 1232.86,978.05 1417.3,793.61 1579.3,793.61 ; 2180.86,1121.61 2180.86,1509.32 2219.49,1547.95 U2.13@2305.83,1547.95 ; 3128.86,1121.61 3128.86,1509.32 3167.49,1547.95 U3.13@3253.83,1547.95 ; 4055.86,1121.61 4055.86,1509.32 4094.49,1547.95 U4.13@4180.83,1547.95 ; 5000.74,1121.61 5000.74,1509.32 5039.37,1547.95 U5.13@5125.71,1547.95 ; 5945.63,1121.61 5945.63,1509.32 5984.26,1547.95 U6.13@6070.59,1547.95 ; 6890.51,1121.61 6890.51,1509.32 6929.14,1547.95 U7.13@7015.48,1547.95 ; 7835.39,1121.61 7835.39,1509.32 7874.02,1547.95 U8.13@7960.36,1547.95 ; 8780.27,1121.61 8780.27,1509.32 8818.9,1547.95 U9.13@8905.24,1547.95 ; 9725.15,1121.61 9725.15,1509.32 9763.78,1547.95 U10.13@9850.12,1547.95 ; 10668.3,1121.61 10670.04,1123.34 10670.04,1509.32 10708.67,1547.95 U11.13@10795,1547.95 ; 11614.92,1355.32 11614.92,1509.32 11653.55,1547.95 U12.13@11739.89,1547.95
  Top Layer w39.37: P1.15@2839.3,886.61 P1.13@2739.3,886.61 2739.3,801.61 2600.3,662.61 1666.3,662.61 1579.86,749.05 1579.86,888.17 1813.3,1121.61 2180.86,1121.61 3128.86,1121.61 4047.3,1121.61 ; C1.2@4047.86,882.32 4047.86,1121.05 4047.3,1121.61 ; 11614.92,1355.32 11614.92,1121.61 10668.3,1121.61 9725.15,1121.61 8780.27,1121.61 7835.39,1121.61 6890.51,1121.61 6529.9,761 6306.23,761 5945.63,1121.61 5000.74,1121.61 4055.86,1121.61 4047.3,1121.61
pads on no net: P1.9 P1.11

## Polygon pours and split planes (outlines as drawn)
GND on Top Layer "TopOverlay-No Net" (solid, remove dead copper, pour order 1000): -0.61,2.2 12834.04,2.2 12834.04,2364.4 -0.61,2364.4
GND on Bottom Layer "TopOverlay-No Net" (solid, remove dead copper, pour order 1001): 0,0 12834.65,0 12834.65,2362.2 0,2362.2

## Keep-outs
Keep-Out Layer:
  the board outline again, w10

## Silkscreen, mask and mechanical layers (free items; w line width, h text height)
Top Overlay:
  lines w10: 2586.12,797.95 2584.12,797.95 2584.12,751.11 1671.12,751.11 1671.12,1094.11 3701.12,1094.11 3701.12,751.11 2761.12,751.11 2761.12,797.24
  text "The Six Hole Size Diameter=4.5mm" at 5205.32,3675.1 h78.74
  text "JIESHOU-V1-1.1" at 5229.86,942.26 h47.24
  text "2017-12-26" at 5573.79,848.12 h43.31
Bottom Overlay:
  lines w10: 787.4,2181.1 1220.47,2181.1 1653.54,2181.1 ; 1732.28,2181.1 2165.35,2181.1 2598.42,2181.1 ; 2677.16,2181.1 3110.24,2181.1 3543.31,2181.1 ; 3622.05,2181.1 4055.12,2181.1 4488.19,2181.1 ; 4566.93,2181.1 5000,2181.1 5433.07,2181.1 ; 5511.81,2181.1 5944.88,2181.1 6377.95,2181.1 6417.32,2181.1 ; 6456.69,2181.1 6889.76,2181.1 7322.83,2181.1 ; 7401.57,2181.1 7834.65,2181.1 8267.72,2181.1 ; 8346.46,2181.1 8779.53,2181.1 9212.6,2181.1 ; 9291.34,2181.1 9724.41,2181.1 10157.48,2181.1 ; 10236.22,2181.1 10669.29,2181.1 11102.36,2181.1 ; 11181.1,2181.1 11614.17,2181.1 12047.24,2181.1
Mechanical 1:
  the board outline again, w10

## Dimensions
12598.43,2125.98 to 12598.43,236.22 on Top Overlay
236.22,236.22 to 6417.32,1181.1 on Top Overlay
0,2362.2 to 0,0 on Top Overlay
0,0 to 12834.65,0 on Top Overlay
875.98,2251.97 to 1820.87,2251.97 on Top Overlay
236.22,2125.98 to 12598.43,2125.98 on Top Overlay
6417.32,1181.1 to 12598.43,236.22 on Top Overlay
12834.65,2362.2 to 12047.24,2181.1 on Top Overlay
12834.65,2362.2 to 11953,2284 on Top Overlay